# Altium PCB PCB_Test_Bench_Back_Scatter_Reflection.PcbDoc
Units mil, origin at the board's own origin, x right, y up, seen from the top; angles counter-clockwise.
Board outline 4483.55 x 2175.38 mil, 2 copper layers (Top Layer, Bottom Layer); 21 components, 18 nets, 111 pads, 0 vias.
Unrouted connection lines stored in the file: 4.
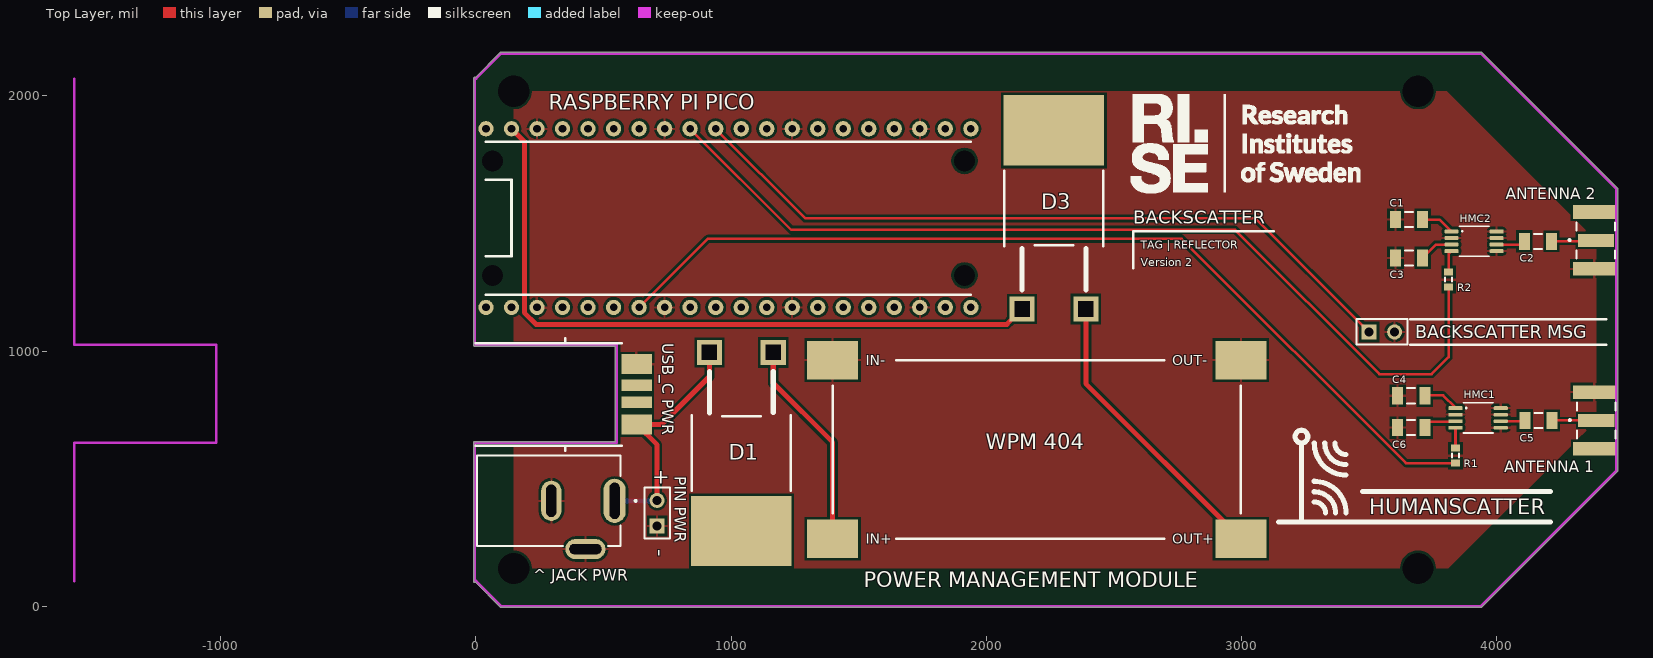
[diagram p0: Top Layer view]
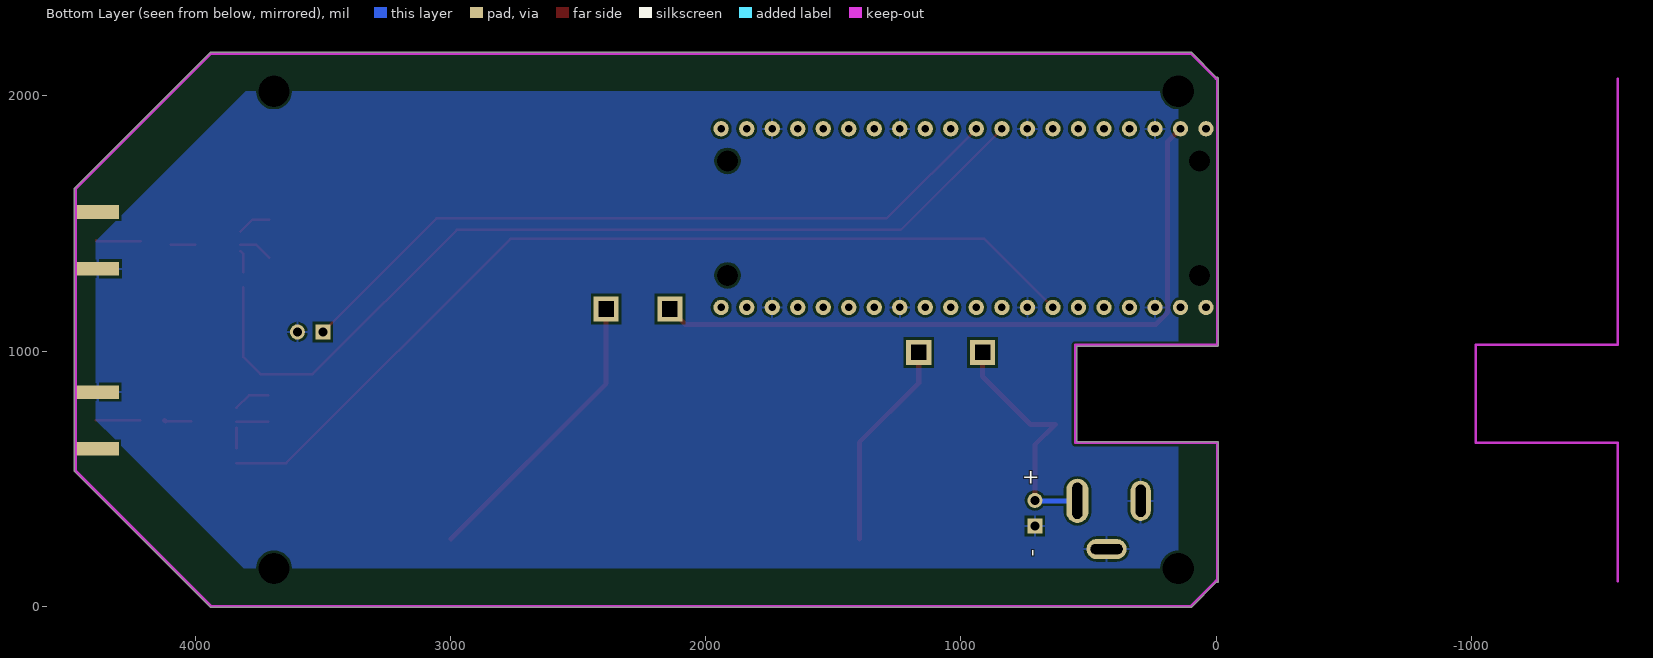
[diagram p1: Bottom Layer view, seen from below]

## Layer stack, top to bottom
Top Solder: solder mask 0.4, Solder Resist, Dk 3.5
Top Layer: signal copper 1.4
Dielectric 1: dielectric 12.6, FR-4, Dk 4.8
Bottom Layer: signal copper 1.4
Bottom Solder: solder mask 0.4, Solder Resist, Dk 3.5

## Board outline
-9.28,99.17 -9.28,640.39 cw(c-4.27,640.39) -4.27,645.4 546.35,645.4 546.35,1019.23 -4.27,1019.23 cw(c-4.27,1024.24) -9.28,1024.24 -9.28,2067.68 cw(c-4.27,2067.68) -1.92,2072.11 95.63,2169.65 95.61,2169.63 cw(c99.17,2166.1) 99.17,2171.12 3937.76,2171.12 cw(c3937.76,2166.1) 3941.32,2169.63 3941.3,2169.65 4472.8,1638.15 4472.78,1638.17 cw(c4469.25,1634.61) 4474.27,1634.61 4474.27,532.24 cw(c4469.25,532.24) 4472.78,528.68 4472.8,528.7 3941.3,-2.8 3941.32,-2.78 cw(c3937.76,0.75) 3937.76,-4.27 99.17,-4.27 cw(c99.17,0.75) 95.61,-2.78 95.63,-2.8 -1.92,94.74 cw(c-4.27,99.17)

## Design rules (kind name [scope] priority, off if disabled: settings)
Clearance [All] p1: gap=10
PolygonConnect [All] p1: connectstyle=Relief reliefconductorwidth=10 reliefentries=4 polygonreliefangle="90 Angle" airgapwidth=10
RoutingVias [All] p1: holewidth=28 width=50 viastyle="Through Hole" minholewidth=28 minwidth=50 maxholewidth=28 maxwidth=50
SolderMaskExpansion [All] p1: expansion=4
UnpouredPolygon [All] p1: allowunpoured=FALSE
Width [All] p1: maxlimit=39.37 minlimit=10 preferedwidth=10
29 further rules are at their usual default settings.

## Components (designator, comment, footprint, x,y, rotation, side; value= is the part's Value field where it differs from the comment)
* "RISE_LOGO" RISE_Logo 2565,1620 r0 top
"^ JACK PWR" "DCJ200-10-A-XX-K_REVA" GCT_DCJ200-10-A-XX-K_REVA 285.43,413.39 r270 top (schematic designator J1)
"ANTENNA 1" "SMA-J-P-H-ST-EM1" SAMTEC_SMA-J-P-H-ST-EM1 4389.76,728.35 r90 top (schematic designator J2)
"ANTENNA 2" "SMA-J-P-H-ST-EM1" SAMTEC_SMA-J-P-H-ST-EM1 4388.54,1433.82 r90 top locked (schematic designator J3)
"BACKSCATTER MSG" "LED" HDR1X2 3500,1075 r0 top (schematic designator P2)
C1 "Cap Semi" C1206 3656.38,1515.28 r180 top
C2 "Cap Semi" C1206 4161.38,1430.28 r180 top
C3 "Cap Semi" C1206 3656.38,1365.28 r180 top
C4 "Cap Semi" C1206 3665,825 r180 top
C5 "Cap Semi" C1206 4163.39,728.35 r180 top
C6 "Cap Semi" C1206 3665,700 r180 top
D1 "Diode 18TQ045" 18TQ045-M3 1165,995 r180 top
D3 "Diode 18TQ045" 18TQ045-M3 2140,1165 r0 top
HMC1 "GaAs_MMIC_SPDT_Switch" HMC190BMS8E 3927.17,738.19 r90 top (schematic designator HMC2)
HMC2 "GaAs_MMIC_SPDT_Switch" HMC190BMS8E 3911.38,1430.28 r90 top (schematic designator HMC1)
"PIN PWR" "Header 2" HDR1X2 710,315 r90 top (schematic designator P1)
"POWER MANAGEMENT MODULE" "WPM_404" WPM404_SMD 1397.64,964.57 r0 top (schematic designator WPM1)
R1 "Res3" J1-0603 3838.58,590.55 r90 top
R2 "Res3" J1-0603 3811.38,1280.28 r90 top
"RASPBERRY PI PICO" "Raspberry Pi Pico" "Raspberry Pi Pico" 39.37,1171.26 r90 top (schematic designator PI1)
"USB_C PWR" "USB C Socket Breakout" Simple_USB_C_Socket_Breakout 570.87,649.61 r90 top (schematic designator USB_C1)

## Footprints (in the part's own frame and the unit in brackets; to place one, negate y for a bottom-side part, rotate by r counter-clockwise, add the part's x,y. Pads: shape width x height; smd on the part's side, far side on the other; paste and mask are expansions set on the pad)
18TQ045-M3 [mm]
  rect 2.5x2.5 hole 1.5 square: 1(0,0) 3(6.35,0)
  rect 10x7 smd: ""(3.175,17.78)
  silkscreen extent -1.75,1.91 8.1,13.77
C1206 [mm] "Chip Capacitor, Body 3.2x1.6mm, IPC High Density"
  rect 1.1x1.7 smd: 1(-1.35,0) 2(1.35,0)
  silkscreen extent -0.4,-0.75 0.4,0.75, body extent -1.7,-0.9 1.7,0.9, height 1.3
GCT_DCJ200-10-A-XX-K_REVA [mm]
  oval 4.4x2.2 hole 1 slot 3.6 at 0 deg: 1(0,6.55)
  oval 4x2 hole 1 slot 3.2 at 0 deg: 2(0,0.25)
  oval 2x4 hole 1 slot 3.2 at 90 deg: 3(4.8,3.65)
  silkscreen extent -4.5,-7.15 4.5,8.75, body extent -4.5,-7.15 5.05,7.15, height 11
HDR1X2 [mm] "Connector; Header; 2 Position"
  rect 1.5x1.5 hole 0.9: 1(0,0)
  round 1.5 hole 0.9: 2(2.54,0)
  silkscreen extent -1.27,-1.27 3.81,1.27
HMC190BMS8E [mm] "GaAs MMIC SPDT SWITCH  DC - 3 GHz"
  rrect50% 0.38x1.4 smd: 0(0.975,2.25) 1(0.325,2.25) 2(-0.325,2.25) 3(-0.975,2.25) 4(-0.975,-2.25) 5(-0.325,-2.25) 6(0.325,-2.25) 7(0.975,-2.25)
  silkscreen extent -1.5,-1.5 1.5,1.5
J1-0603 [mm] "Chip Resistor, Body 1.6x0.8mm, IPC High Density"
  rect 0.7x0.9 smd: 1(-0.75,0) 2(0.75,0)
  silkscreen extent -0.2,-0.35 0.2,0.35, body extent -0.85,-0.48 0.85,0.48, height 0.9
"Raspberry Pi Pico" [mil]
  round 60 hole 30: 0(0,0) 1(0,-100) 2(0,-200) 3(0,-300) 4(0,-400) 5(0,-500) 6(0,-600) 7(0,-700) 8(0,-800) 9(0,-900) 10(0,-1000) 11(0,-1100) 12(0,-1200) 13(0,-1300) 14(0,-1400) 15(0,-1500) 16(0,-1600) 17(0,-1700) 18(0,-1800) 19(0,-1900) 20(700,-1900) 21(700,-1800) 22(700,-1700) 23(700,-1600) 24(700,-1500) 25(700,-1400) 26(700,-1300) 27(700,-1200) 28(700,-1100) 29(700,-1000) 30(700,-900) 31(700,-800) 32(700,-700) 33(700,-600) 34(700,-500) 35(700,-400) 36(700,-300) 37(700,-200) 38(700,-100) 39(700,0)
  round 60 hole 82.68: 51(125.59,-24.8) 51(125.59,-1875.2) 51(574.41,-24.8) 51(574.41,-1875.2)
  silkscreen extent 50,-1900 650,0
RISE_Logo [mil]
  silkscreen extent 0,0 900,386
SAMTEC_SMA-J-P-H-ST-EM1 [mm]
  rect 1.27x3.6 smd: 1(0,0)
  rect 1.35x4.2 smd: 2_1(-2.825,0.2) 3_1(2.825,0.2)
  rect 1.35x4.2 smd far side: 2_2(-2.825,0.2) 3_2(2.825,0.2)
  silkscreen extent -1.8,-1.9 1.8,2.72, body extent -3.17,-11.42 3.18,1.91, height 3.55
Simple_USB_C_Socket_Breakout [mm] "Simple USB C Socket Breakout"
  rect 2x3 smd: 0(1.6,-1.5) 3(7.6,-1.5)
  rect 1.16x3 smd: 1(3.8,-1.5) 2(5.5,-1.5)
  silkscreen extent -1,0 10.2,14.5
WPM404_SMD [mil]
  rect 200x150 smd: 0(0,0) 1(0,-700) 2(1600,0) 3(1600,-700)
  silkscreen extent 0,-700 1600,0

## Part data
*: "RISE_Logo"
"^ JACK PWR": "Power Barrel Connector Jack 2.05mm ID (0.081), 5.50mm OD (0.217) Through Hole, Right Angle"
"ANTENNA 1" "ANTENNA 2": "SMA Connector Jack, Female Socket 50Ohm Board Edge, End Launch Solder"
"BACKSCATTER MSG": library part "Header 2", "Header, 2-Pin"
C1 C2 C3 C4 C5 C6: "Capacitor (Semiconductor SIM Model)"
D1 D3: "Schottky Rectifier"
HMC1 HMC2: library part HMC190BMS8E
"PIN PWR": "Header, 2-Pin"
"POWER MANAGEMENT MODULE": "Velleman WPM404 Whadda DC-DC Adjustable Voltage Step-Down Module LM2596S"
R1 R2: "Resistor"
"RASPBERRY PI PICO": library part Raspberry_Pi_Pico_Header
"USB_C PWR": "Simple USB C Socket Breakout"

## Free pads (board coordinates)
  round 60 hole 122.05: FIX(148.39,148.39) FIX(148.39,2018.46) FIX(3691.69,148.39) FIX(3691.69,2018.46)

## Nets (pads, with @x,y where several pads share a name; then routed paths per layer and width w, separated by ;. In a path a pad name is that pad's centre, name@x,y a point inside that pad or via, vN(x,y) a via of type N, cw(c..) or ccw(c..) an arc to the next point about the centre after c; other vN are vias at no path point)
GND: "^ JACK PWR.2" "^ JACK PWR.3" "ANTENNA 1.2_1" "ANTENNA 1.2_2" "ANTENNA 1.3_1" "ANTENNA 1.3_2" "ANTENNA 2.2_1" "ANTENNA 2.2_2" "ANTENNA 2.3_1" "ANTENNA 2.3_2" "BACKSCATTER MSG.2" "PIN PWR.1" "POWER MANAGEMENT MODULE.0" "POWER MANAGEMENT MODULE.2" "RASPBERRY PI PICO.2" "RASPBERRY PI PICO.7" "RASPBERRY PI PICO.12" "RASPBERRY PI PICO.17" "RASPBERRY PI PICO.22" "RASPBERRY PI PICO.27" "RASPBERRY PI PICO.32" "RASPBERRY PI PICO.37" "USB_C PWR.3" C1.2 C3.2 C4.2 C6.2 HMC1.1 HMC1.4 HMC1.6 HMC1.7 HMC2.1 HMC2.4 HMC2.6 HMC2.7
NetC1_1: C1.1 HMC2.0 | length 132.9
  Top Layer w10: C1.1@3709.53,1515.55 C1.1 3776.18,1515.28 HMC2.0
NetC2_1: "ANTENNA 2.1" C2.1 | length 175.5
  Top Layer w10: C2.1 4385,1430.28 4388.54,1433.82
NetC2_2: C2.2 HMC2.5 | length 95.5
  Top Layer w10: HMC2.5 C2.2@4095.43,1417.48
NetC3_1: C3.1 HMC2.2 | length 134.9
  Top Layer w10: C3.1 3761.73,1417.48 HMC2.2
NetC4_1: C4.1 HMC1.0 | length 144.1
  Top Layer w10: C4.1@3714.57,826.77 3790.12,826.77 HMC1.0@3838.58,778.31
NetC5_1: "ANTENNA 1.1" C5.1 | length 173.2
  Top Layer w10: C5.1 4389.76,728.35
NetC5_2: C5.2 HMC1.5 | length 105.7
  Top Layer w10: HMC1.5 C5.2@4117.28,725.39
  Top Layer w19.68: C5.2@4117.28,725.39 C5.2@4120.24,728.35
NetC6_1: C6.1 HMC1.2 | length 124
  Top Layer w10: C6.1@3714.57,723.35 HMC1.2@3838.58,723.35
NetD1_1: "POWER MANAGEMENT MODULE.1" D1.1 | length 826.8
  Top Layer w19.68: D1.1 1165,875 1397.64,642.36 1397.64,264.57
NetD1_3: "^ JACK PWR.1" "PIN PWR.2" "USB_C PWR.0" D1.3 | length 955.7
  Top Layer w19.68: 708.39,413.39 710,415 710,632.52 629.92,712.6 727.4,712.6 915,900.2 D1.3
  Bottom Layer w19.68: 543.31,413.39 708.39,413.39
NetD3_1: "RASPBERRY PI PICO.38" D3.1 | length 2736
  Top Layer w19.68: 139.37,1871.26 190,1820.63 190,1206.66 189.53,1206.19 189.53,1150.61 235.14,1105 2080,1105 D3.1
NetD3_3: "POWER MANAGEMENT MODULE.3" D3.3 | length 1152.1
  Top Layer w19.68: D3.3 2390,872.2 2997.64,264.57
NetHMC1_3: HMC2.3 R2.2 | length 86.8
  Top Layer w10: R2.2 3811.38,1380.47 HMC2.3
NetHMC2_3: HMC1.3 R1.2 | length 79.7
  Top Layer w10: R1.2 HMC1.3
NetP2_1: "BACKSCATTER MSG.1" "RASPBERRY PI PICO.30" | length 2890.5
  Top Layer w10: 939.37,1871.26 1290.63,1520 3055,1520 3500,1075
NetPI1_6: "RASPBERRY PI PICO.6" R1.1 | length 3674.6
  Top Layer w10: 639.37,1171.26 908.11,1440 2765,1440 3643.98,561.02 R1.1
NetPI1_31: "RASPBERRY PI PICO.31" R2.1 | length 3672
  Top Layer w10: 839.37,1871.26 1235.63,1475 2975,1475 3540,910 3745,910 3811.38,976.38 R2.1
pads on no net: "RASPBERRY PI PICO.0" "RASPBERRY PI PICO.1" "RASPBERRY PI PICO.3" "RASPBERRY PI PICO.4" "RASPBERRY PI PICO.5" "RASPBERRY PI PICO.8" "RASPBERRY PI PICO.9" "RASPBERRY PI PICO.10" "RASPBERRY PI PICO.11" "RASPBERRY PI PICO.13" "RASPBERRY PI PICO.14" "RASPBERRY PI PICO.15" "RASPBERRY PI PICO.16" "RASPBERRY PI PICO.18" "RASPBERRY PI PICO.19" "RASPBERRY PI PICO.20" "RASPBERRY PI PICO.21" "RASPBERRY PI PICO.23" "RASPBERRY PI PICO.24" "RASPBERRY PI PICO.25" "RASPBERRY PI PICO.26" "RASPBERRY PI PICO.28" "RASPBERRY PI PICO.29" "RASPBERRY PI PICO.33" "RASPBERRY PI PICO.34" "RASPBERRY PI PICO.35" "RASPBERRY PI PICO.36" "RASPBERRY PI PICO.39" "RASPBERRY PI PICO.51" "USB_C PWR.1" "USB_C PWR.2" D1. D3.

## Polygon pours and split planes (outlines as drawn)
GND on Top Layer "Bottom Layer-No Net" (solid, remove dead copper, pour order 2): 148.39,2018.46 3691.69,2018.46 3803.9,2018.46 4388.54,1433.82 4389.76,1432.6 4389.76,728.35 3809.8,148.39 3691.69,148.39 148.39,148.39
GND on Bottom Layer "Bottom Layer-No Net" (solid, remove dead copper, pour order 4): 148.39,2018.46 3691.69,2018.46 3801.54,2018.46 4390,1430 4390,730 3810,150 3808.39,148.39 148.39,148.39

## Keep-outs
Keep-Out Layer:
  lines w10: -1574.06,99.17 -1574.06,640.39 -1018.42,640.39 -1018.42,1024.24 -1574.05,1024.24 -1574.05,2067.68 ; -4.27,99.17 -4.27,640.39 551.37,640.39 551.37,1024.24 -4.27,1024.24 -4.27,2067.68 ; 0.75,99.17 99.17,0.75 3937.76,0.75 4469.25,532.24 4469.25,1634.61 3937.76,2166.1 99.17,2166.1 0.75,2067.68

## Silkscreen, mask and mechanical layers (free items; w line width, h text height)
Top Overlay:
  lines w9: 3660,1025 4430,1025 ; 3660,1125 4430,1125
  lines w10: 2575,1325 2575,1470.47 3126.18,1470.47
  lines w20: 3145,330 4210,330 ; 3235,330 3235,640 ; 3285,408.98 cw(c3285,365) 3328.98,365 ; 3285,448.93 cw(c3285,365) 3368.93,365 ; 3285,490 cw(c3285,365) 3410,365 ; 3285,638.98 ccw(c3410,638.98) 3410,513.98 ; 3326.07,638.98 ccw(c3410,638.98) 3410,555.05 ; 3366.02,638.98 ccw(c3410,638.98) 3410,595 ; 3475,450 4210,450 ; 3235,640 ccw(c3235,665) 3260,665 ccw(c3235,665) 3235,690 ccw(c3235,665) 3210,665 ccw(c3235,665) 3235,640
  text "BACKSCATTER" at 2575,1500 h51.18
  text "TAG | REFLECTOR" at 2604.53,1401.57 h31.5
  text "Version 2" at 2604.53,1332.68 h31.5
  text "+" at 690,480 h60
  text "HUMANSCATTER" at 3500,360 h60
  text "-" at 740,195 h60 r90
Bottom Overlay:
  text "+" at 690,480 h60
  text "-" at 740,195 h60 r90

## Text inside footprints (layer, text, board x,y; h text height)
"ANTENNA 1": Mechanical 13 "PCB EDGE" at 4456.76,897.8 h24 r90
"ANTENNA 2": Mechanical 13 "PCB EDGE" at 4455.54,1603.27 h24 r90
"POWER MANAGEMENT MODULE": Top Overlay "WPM 404" at 1997.64,614.57 h60; Top Overlay "OUT+" at 2727.64,244.57 h39.37; Top Overlay "OUT-" at 2727.64,944.57 h39.37; Top Overlay "IN-" at 1527.64,944.57 h39.37; Top Overlay "IN+" at 1527.64,244.57 h39.37